# Altium PCB VIrtex_XC7vx690t_2ffg1927i_T_B.PcbDoc (part 5 of 5)
Units mm, origin at the board's own origin, x right, y up, seen from the top; angles counter-clockwise.
Board outline 230 x 148 mm, 12 copper layers (Top Layer 1, GND_IN_Layer, 1_V_IN_layer, 1.2_V_IN_layer, 1.8_V_IN_layer, 3.3_V_IN_layer, IN_Layer 6, IN_Layer 7, IN_Layer 8, IN_Layer 9, IN_Layer 10, Bottom Layer), stack 1.452 mm thick; 73 components, 655 nets, 2765 pads, 42 vias.
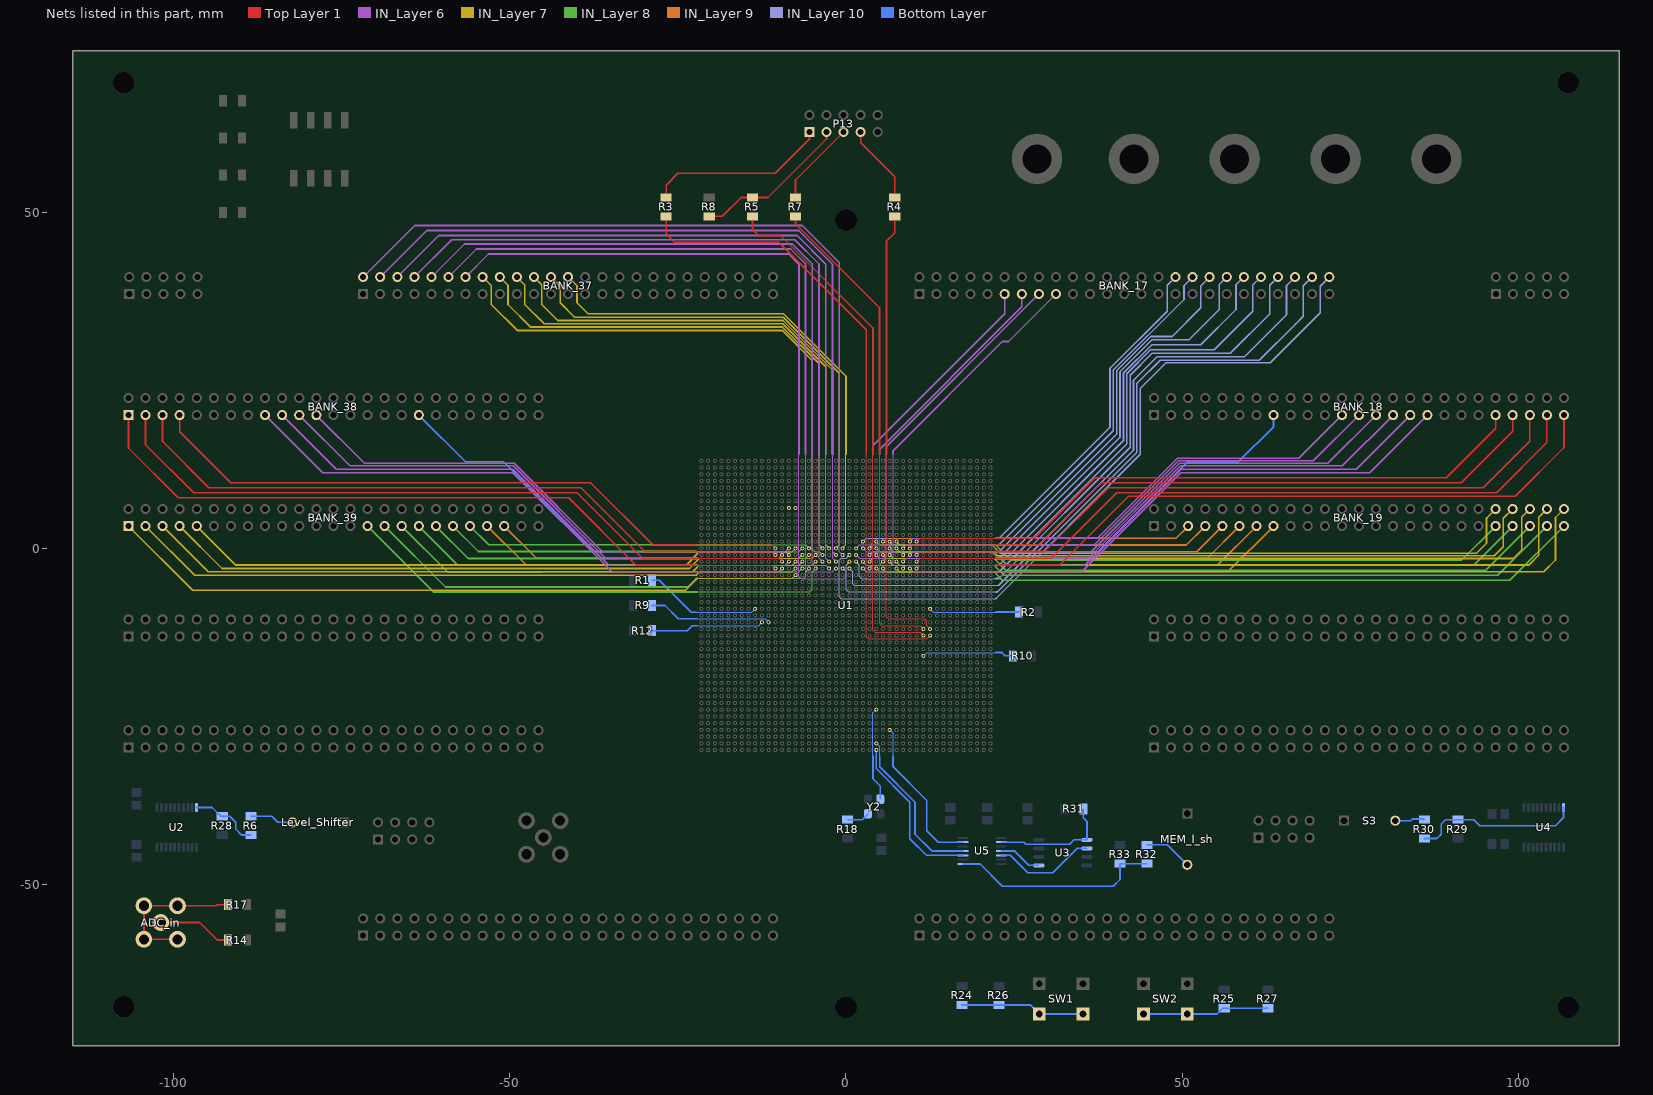
[diagram p15: the nets of this part, all layers, seen from the top]

## Via types
v1: diameter 0.8, hole 0.4, Top Layer 1 to Bottom Layer, 42 vias

## Nets (pads, with @x,y where several pads share a name; then routed paths per layer and width w, separated by ;. In a path a pad name is that pad's centre, name@x,y a point inside that pad or via, vN(x,y) a via of type N, cw(c..) or ccw(c..) an arc to the next point about the centre after c; other vN are vias at no path point) (continued)
N25: BANK_17.32 U1.N25 | length 70.2
  IN_Layer 10 w0.14: U1.N25@2.5,1 3,1.5 22.75,1.5
  IN_Layer 10 w0.254: 22.75,1.5 39.25,18 39.25,26.75 47.75,35.25 47.75,39.09 BANK_17.32@49,40.34
N27: BANK_19.7 U1.N27 | length 50.3
  IN_Layer 9 w0.14: U1.N27@4.5,1 5.01,0.49 22.3,0.49
  IN_Layer 9 w0.254: 22.3,0.49 50.61,0.49 BANK_19.7@53.42,3.3
N28: BANK_19.5 U1.N28 | length 46.3
  IN_Layer 9 w0.14: U1.N28@5.5,1 5.583,1 6.083,1.5 22.3,1.5
  IN_Layer 9 w0.254: 22.3,1.5 49.08,1.5 BANK_19.5@50.88,3.3
N29: BANK_19.41 U1.N29 | length 93.3
  IN_Layer 8 w0.14: U1.N29@6.5,1 6.99,0.51 22.24,0.51 22.3,0.45
  IN_Layer 8 w0.254: 22.3,0.45 24.5,-1.75 91.55,-1.75 BANK_19.41@96.6,3.3
N30: BANK_19.42 U1.N30 | length 94.7
  IN_Layer 7 w0.14: U1.N30@7.5,1 8.01,0.49 21.703,0.49 22.3,-0.107
  IN_Layer 7 w0.254: 22.3,-0.107 22.945,-0.752 93.748,-0.752 95.25,0.75 95.25,4.49 BANK_19.42@96.6,5.84
N32: BANK_18.23 U1.N32 | length 72
  IN_Layer 6 w0.14: U1.N32@9.5,1 9.99,1.49 22.3,1.49
  IN_Layer 6 w0.254: 22.3,1.49 37.395,1.49 49.283,13.378 67.318,13.378 BANK_18.23@73.74,19.8
N33: BANK_18.41 U1.N33 | length 95
  Top Layer 1 w0.14: U1.N33@10.5,1 11.01,1.51 22.3,1.51
  Top Layer 1 w0.254: 22.3,1.51 28.01,1.51 37,10.5 89.25,10.5 96.6,17.85 BANK_18.41@96.6,19.8
NetP13_1: P13.1 R3.2 | length 27.1
  Top Layer 1 w0.254: R3.2@-26.75,52.15 -26.75,54 -25,55.75 -10.5,55.75 -5.442,60.808 P13.1@-5.442,61.892
NetP13_3: P13.3 R5.2 R8.2 | length 23.2
  Top Layer 1 w0.254: R8.2@-20.333,49.35 -18.4,49.35 -15.6,52.15 R5.2@-13.917,52.15 -11.6,52.15 -2.902,60.848 P13.3@-2.902,61.892
NetP13_5: P13.5 R7.2 | length 12.7
  Top Layer 1 w0.254: R7.2@-7.5,52.15 -7.5,54.753 P13.5@-0.362,61.892
NetP13_7: P13.7 R4.1 | length 11.8
  Top Layer 1 w0.254: P13.7@2.178,61.892 2.178,60.322 7.25,55.25 R4.1@7.25,52.15
NetP14_1: ADC_in.1 R14.2 | length 11.3
  Top Layer 1 w0.254: ADC_in.1@-101.9,-55.65 -96.1,-55.65 -93.5,-58.25 R14.2@-91.9,-58.25 ; R14.2@-91.9,-58.975 R14.2@-91.9,-58.75
NetP14_2: ADC_in.2 R17.2 | length 22.6
  Top Layer 1 w0.254: ADC_in.2@-99.4,-58.15 ADC_in.2@-104.4,-58.15 ADC_in.2@-104.4,-53.15 ADC_in.2@-99.4,-53.15 -93.65,-53.15 -93.5,-53 R17.2@-91.9,-53
NetR1_1: R1.1 U1.AC9 | length 17.5
  Bottom Layer w0.14: -22.1,-9.5 -14,-9.5 U1.AC9@-13.5,-9
  Bottom Layer w0.254: R1.1@-28.85,-4.75 -27.75,-4.75 -23,-9.5 -22.1,-9.5
NetR2_1: R2.1 U1.AC35 | length 13.4
  Bottom Layer w0.14: U1.AC35@12.5,-9 12.99,-9.49 22.3,-9.49
  Bottom Layer w0.254: 22.3,-9.49 R2.1@25.74,-9.49
NetR6_1: R6.1 R28.2 U2.OE | length 10.4
  Bottom Layer w0.254: U2.OE@-96.575,-38.55 -94.275,-38.55 -92.975,-39.85 -91.65,-39.85 -90.75,-40.75 -90.75,-41.75 -89.85,-42.65 R6.1@-88.5,-42.65
NetR6_2: Level_Shifter.2 R6.2 | length 6.6
  Bottom Layer w0.254: R6.2@-88.5,-39.85 -85.4,-39.85 -84.5,-40.75 Level_Shifter.2@-82.31,-40.75
NetR9_1: R9.1 U1.AE11 | length 18.4
  Bottom Layer w0.14: -22.1,-10.49 -12.01,-10.49 U1.AE11@-11.5,-11
  Bottom Layer w0.254: R9.1@-28.85,-8.5 -26.916,-8.5 -24.926,-10.49 -22.1,-10.49
NetR10_1: R10.1 U1.AK34 | length 13.8
  Bottom Layer w0.14: U1.AK34@11.5,-16 11.99,-15.51 22.3,-15.51
  Bottom Layer w0.254: 22.3,-15.51 23.201,-15.51 23.691,-16 R10.1@24.85,-16
NetR12_1: R12.1 U1.AE10 | length 16.9
  Bottom Layer w0.14: -22.1,-11.5 -13,-11.5 U1.AE10@-12.5,-11
  Bottom Layer w0.254: R12.1@-28.85,-12.25 -23.6,-12.25 -22.85,-11.5 -22.1,-11.5
NetR18_2: R18.2 Y2.1 | length 3.4
  Bottom Layer w0.254: R18.2@0.25,-40.35 2.437,-40.35 3.25,-39.537 Y2.1@3.25,-39.5
NetR24_1: R24.1 R26.1 SW1.1 SW1.2 | length 18.6
  Bottom Layer w0.254: R24.1@17.25,-67.9 R26.1@22.75,-67.9 27.4,-67.9 SW1.2@28.75,-69.25 SW1.1@35.25,-69.25
NetR25_1: R25.1 R27.1 SW2.1 SW2.2 | length 18.9
  Bottom Layer w0.254: SW2.2@44.25,-69.25 SW2.1@50.75,-69.25 55.175,-69.25 56.025,-68.4 R25.1@56.25,-68.4 R27.1@62.75,-68.4
NetR29_2: R29.2 R30.1 U4.OE | length 25.1
  Bottom Layer w0.254: R30.1@86,-43.15 87.85,-43.15 88.5,-42.5 88.5,-41 89.15,-40.35 R29.2@91,-40.35 93.35,-40.35 94.25,-41.25 105.5,-41.25 106.675,-40.075 U4.OE@106.675,-38.55
NetR30_2: R30.2 S3.2 | length 4.5
  Bottom Layer w0.254: S3.2@81.68,-40.5 84,-40.5 84.25,-40.25 85.9,-40.25 R30.2@86,-40.35
NetR31_1: R31.1 U3.1 U5.A1 | length 17.9
  Bottom Layer w0.254: U5.A1@23.1,-43.7 26.45,-43.7 26.75,-44 33.25,-44 33.905,-43.345 U3.1@35.825,-43.345 35.825,-40.575 35.3,-40.05 R31.1@35.3,-38.75
NetR32_1: R32.1 R33.2 U5.OE | length 31.5
  Bottom Layer w0.254: U5.OE@17.4,-46.95 19.95,-46.95 23.25,-50.25 39.75,-50.25 40.75,-49.25 R33.2@40.75,-46.9 R32.1@44.75,-46.9
NetR32_2: MEM_l_sh.2 R32.2 | length 7.2
  Bottom Layer w0.254: R32.2@44.75,-44.1 47.79,-44.1 MEM_l_sh.2@50.75,-47.06
NetU1_AV27: U1.AV27 Y2.3 | length 14
  Bottom Layer w0.14: 4.01,-30.9 4.01,-24.49 U1.AV27@4.5,-24
  Bottom Layer w0.254: 4.01,-30.9 4.01,-34.26 5.098,-35.348 Y2.3@5.098,-37.3
NetU1_BA29: U1.BA29 U5.B1 | length 23.4
  Bottom Layer w0.14: U1.BA29@6.5,-27 7,-27.5 7,-30.75 7,-30.9
  Bottom Layer w0.254: 7,-30.9 7,-32.5 12,-37.5 12,-42 13.7,-43.7 U5.B1@17.4,-43.7
NetU1_BC27: U1.BC27 U5.B3 | length 24.1
  Bottom Layer w0.14: U1.BC27@4.5,-29 5,-29.5 5,-30.9
  Bottom Layer w0.254: 5,-30.9 5,-32.5 10.25,-37.75 10.25,-42.5 12.75,-45 U5.B3@17.4,-45
NetU1_BD27: U1.BD27 U5.B4 | length 24.2
  Bottom Layer w0.254: U1.BD27@4.5,-30 4.5,-30.9 4.5,-32.75 9.5,-37.75 9.5,-43.178 11.972,-45.65 U5.B4@17.4,-45.65
NetU1_H14: U1.H14
NetU1_H15: U1.H15
NetU3_2: U3.2 U5.A4 | length 15.3
  Bottom Layer w0.254: U5.A4@23.1,-45.65 24.4,-45.65 27,-48.25 30.75,-48.25 34.385,-44.615 U3.2@35.825,-44.615
NetU3_5: U3.5 U5.A3 | length 6.5
  Bottom Layer w0.254: U5.A3@23.1,-45 25,-45 27.155,-47.155 U3.5@28.675,-47.155
P12: BANK_38.7 U1.P12 | length 98.2
  Top Layer 1 w0.14: -22.3,0.51 -11.01,0.51 U1.P12@-10.5,0
  Top Layer 1 w0.254: BANK_38.7@-99.08,19.8 -99.08,17.33 -91.5,9.75 -38,9.75 -28.76,0.51 -22.3,0.51
P14: BANK_38.23 U1.P14 | length 78.9
  IN_Layer 6 w0.14: -22.05,-0.51 -9.01,-0.51 U1.P14@-8.5,0
  IN_Layer 6 w0.254: BANK_38.23@-78.76,19.8 -71.59,12.63 -49.343,12.63 -36.203,-0.51 -22.05,-0.51
P15: BANK_39.9 U1.P15 | length 92.5
  IN_Layer 7 w0.14: -22.1,-0.826 -21.784,-0.51 -8.01,-0.51 U1.P15@-7.5,0
  IN_Layer 7 w0.254: BANK_39.9@-96.54,3.3 -90.74,-2.5 -23.774,-2.5 -22.1,-0.826
P16: BANK_39.39 U1.P16 | length 53.7
  IN_Layer 8 w0.14: -22.1,-0.49 -6.99,-0.49 U1.P16@-6.5,0
  IN_Layer 8 w0.254: BANK_39.39@-58.44,3.3 -54.65,-0.49 -22.1,-0.49
P17: BANK_39.41 U1.P17 | length 51.8
  IN_Layer 8 w0.14: -22.1,0.51 -6.01,0.51 U1.P17@-5.5,0
  IN_Layer 8 w0.254: BANK_39.41@-55.9,3.3 -53.11,0.51 -22.1,0.51
P19: BANK_37.18 U1.P19 | length 82.2
  IN_Layer 7 w0.14: -4,14 -4,0.5 U1.P19@-3.5,0
  IN_Layer 7 w0.254: BANK_37.18@-51.48,40.34 -50.25,39.11 -50.25,36.25 -46.889,32.889 -9.437,32.889 -4,27.452 -4,14
P20: BANK_37.20 U1.P20 | length 80.4
  IN_Layer 7 w0.14: -3,14 -3,0.5 U1.P20@-2.5,0
  IN_Layer 7 w0.254: BANK_37.20@-48.94,40.34 -47.75,39.15 -47.75,36.25 -44.881,33.381 -9.4,33.381 -3,26.981 -3,14
P21: BANK_37.24 U1.P21 | length 76.5
  IN_Layer 7 w0.14: U1.P21@-1.5,0 -1,0.5 -1,14
  IN_Layer 7 w0.254: BANK_37.24@-43.86,40.34 -42.5,38.98 -42.5,36.5 -40.365,34.365 -9.326,34.365 -1,26.039 -1,14
P22: BANK_37.26 U1.P22 | length 74.7
  IN_Layer 7 w0.14: U1.P22@-0.5,0 0,0.5 0,14
  IN_Layer 7 w0.254: BANK_37.26@-41.32,40.34 -40,39.02 -40,36.5 -38.357,34.857 -9.289,34.857 0,25.568 0,14
P24: BANK_17.11 U1.P24 | length 47.9
  IN_Layer 6 w0.14: U1.P24@1.5,0 1.99,0.49 3.683,0.49 4,0.807 4,14
  IN_Layer 6 w0.254: 4,14 4,15.25 23.6,34.85 BANK_17.11@23.6,37.8
P25: BANK_17.13 U1.P25 | length 49.6
  IN_Layer 6 w0.14: U1.P25@2.5,0 2.99,-0.49 4.703,-0.49 5,-0.193 5,14
  IN_Layer 6 w0.254: 5,14 5,14.75 26.14,35.89 BANK_17.13@26.14,37.8
P26: BANK_17.34 U1.P26 | length 71.2
  IN_Layer 10 w0.14: U1.P26@3.5,0 4,0.5 22.75,0.5
  IN_Layer 10 w0.254: 22.75,0.5 39.75,17.5 39.75,26.5 50.25,37 50.25,39.05 BANK_17.34@51.54,40.34
P27: BANK_19.9 U1.P27 | length 53.2
  IN_Layer 9 w0.14: U1.P27@4.5,0 5.01,-0.51 22.3,-0.51
  IN_Layer 9 w0.254: 22.3,-0.51 52.15,-0.51 BANK_19.9@55.96,3.3
P29: BANK_19.43 U1.P29 | length 96.1
  IN_Layer 8 w0.14: U1.P29@6.5,0 6.99,-0.49 21.99,-0.49 22.3,-0.8
  IN_Layer 8 w0.254: 22.3,-0.8 24,-2.5 93.34,-2.5 BANK_19.43@99.14,3.3
P30: BANK_19.44 U1.P30 | length 97.5
  IN_Layer 7 w0.14: U1.P30@7.5,0 8.01,-0.51 21.703,-0.51 22.3,-1.107
  IN_Layer 7 w0.254: 22.3,-1.107 22.319,-1.126 96.374,-1.126 97.75,0.25 97.75,4.45 BANK_19.44@99.14,5.84
P31: BANK_18.25 U1.P31 | length 76
  IN_Layer 6 w0.14: U1.P31@8.5,0 8.99,0.49 22.3,0.49
  IN_Layer 6 w0.254: 22.3,0.49 36.924,0.49 49.438,13.004 69.484,13.004 BANK_18.25@76.28,19.8
P32: BANK_18.43 U1.P32 | length 99.3
  Top Layer 1 w0.14: U1.P32@9.5,0 10.01,0.51 22.3,0.51
  Top Layer 1 w0.254: 22.3,0.51 28.76,0.51 38,9.75 91.5,9.75 99.14,17.39 BANK_18.43@99.14,19.8
R12: BANK_38.5 U1.R12 | length 102
  Top Layer 1 w0.14: -22.3,-0.49 -11.01,-0.49 U1.R12@-10.5,-1
  Top Layer 1 w0.254: BANK_38.5@-101.62,19.8 -101.62,15.87 -94.75,9 -39.415,9 -29.925,-0.49 -22.3,-0.49
R13: BANK_38.21 U1.R13 | length 80.8
  IN_Layer 6 w0.14: -22.1,-1.51 -10.01,-1.51 U1.R13@-9.5,-1
  IN_Layer 6 w0.254: BANK_38.21@-81.3,19.8 -73.75,12.25 -49.492,12.25 -35.732,-1.51 -22.1,-1.51
R14: BANK_38.35 U1.R14 | length 63.6
  Bottom Layer w0.14: -22.1,-0.5 -9,-0.5 U1.R14@-8.5,-1
  Bottom Layer w0.254: BANK_38.35@-63.52,19.8 -56.581,12.861 -50.93,12.861 -37.569,-0.5 -22.1,-0.5
R16: BANK_39.7 U1.R16 | length 96
  IN_Layer 7 w0.14: -22.1,-1.826 -21.784,-1.51 -7.01,-1.51 U1.R16@-6.5,-1
  IN_Layer 7 w0.254: BANK_39.7@-99.08,3.3 -92.78,-3 -23.274,-3 -22.1,-1.826
R17: BANK_39.37 U1.R17 | length 57.7
  IN_Layer 8 w0.14: -22.1,-1.51 -6.01,-1.51 U1.R17@-5.5,-1
  IN_Layer 8 w0.254: BANK_39.37@-60.98,3.3 -56.17,-1.51 -22.1,-1.51
R18: BANK_39.45 U1.R18 | length 48.5
  IN_Layer 9 w0.14: -22.1,-1.5 -5,-1.5 U1.R18@-4.5,-1
  IN_Layer 9 w0.254: BANK_39.45@-50.82,3.3 -46.02,-1.5 -22.1,-1.5
R19: BANK_37.16 U1.R19 | length 85.8
  IN_Layer 7 w0.14: -5,14 -5,-0.193 -4.683,-0.51 -3.99,-0.51 U1.R19@-3.5,-1
  IN_Layer 7 w0.254: BANK_37.16@-54.02,40.34 -52.75,39.07 -52.75,36.25 -48.897,32.397 -9.473,32.397 -5,27.923 -5,14
R21: BANK_37.22 U1.R21 | length 79.6
  IN_Layer 7 w0.14: -2,14 -2,-0.5 U1.R21@-1.5,-1
  IN_Layer 7 w0.254: BANK_37.22@-46.4,40.34 -45.25,39.19 -45.25,36.25 -42.873,33.873 -9.363,33.873 -2,26.51 -2,14
R22: BANK_37.2 U1.R22 | length 120
  IN_Layer 6 w0.14: -1,14 -1,-0.5 U1.R22@-0.5,-1
  IN_Layer 6 w0.254: BANK_37.2@-71.8,40.34 -64.14,48 -6.5,48 -1,42.5 -1,14
R23: BANK_17.50 U1.R23 | length 108.1
  IN_Layer 10 w0.14: U1.R23@0.5,-1 0.01,-1.49 -0.683,-1.49 -0.99,-1.797 -0.99,-7.203 -0.693,-7.5 22.279,-7.5 22.3,-7.479
  IN_Layer 10 w0.254: 22.3,-7.479 43.75,13.971 43.75,23.75 47.589,27.589 63.089,27.589 70.5,35 70.5,38.98 BANK_17.50@71.86,40.34
R24: BANK_17.15 U1.R24 | length 53.3
  IN_Layer 6 w0.14: U1.R24@1.5,-1 2,-1.5 5.75,-1.5 6,-1.25 6,14
  IN_Layer 6 w0.254: 6,14 6,15.12 BANK_17.15@28.68,37.8
R26: BANK_17.36 U1.R26 | length 75.1
  IN_Layer 10 w0.14: U1.R26@3.5,-1 4,-0.5 22.75,-0.5
  IN_Layer 10 w0.254: 22.75,-0.5 40.25,17 40.25,26.442 45.308,31.5 48.5,31.5 52.75,35.75 52.75,39.01 BANK_17.36@54.08,40.34
R27: BANK_19.13 U1.R27 | length 60
  IN_Layer 9 w0.14: U1.R27@4.5,-1 4.99,-1.49 4.99,-2.24 5.26,-2.51 22.3,-2.51
  IN_Layer 9 w0.254: 22.3,-2.51 55.23,-2.51 BANK_19.13@61.04,3.3
R28: BANK_19.11 U1.R28 | length 55.2
  IN_Layer 9 w0.14: U1.R28@5.5,-1 6.01,-1.51 22.3,-1.51
  IN_Layer 9 w0.254: 22.3,-1.51 53.69,-1.51 BANK_19.11@58.5,3.3
R29: BANK_19.46 U1.R29 | length 101.3
  IN_Layer 7 w0.14: U1.R29@6.5,-1 7.01,-1.51 22.3,-1.51
  IN_Layer 7 w0.254: 22.3,-1.51 99.24,-1.51 100.5,-0.25 100.5,4.66 BANK_19.46@101.68,5.84
R31: BANK_18.15 U1.R31 | length 64.7
  Bottom Layer w0.14: U1.R31@8.5,-1 8.99,-0.51 22.3,-0.51
  Bottom Layer w0.254: 22.3,-0.51 37.49,-0.51 50.839,12.839 58.339,12.839 63.58,18.08 BANK_18.15@63.58,19.8
R32: BANK_18.27 U1.R32 | length 77.9
  IN_Layer 6 w0.14: U1.R32@9.5,-1 9.99,-0.51 22.3,-0.51
  IN_Layer 6 w0.254: 22.3,-0.51 36.453,-0.51 49.593,12.63 71.65,12.63 BANK_18.27@78.82,19.8
R33: BANK_18.45 U1.R33 | length 102.1
  Top Layer 1 w0.14: U1.R33@10.5,-1 11.01,-0.49 22.3,-0.49
  Top Layer 1 w0.254: 22.3,-0.49 29.51,-0.49 39,9 94.75,9 101.68,15.93 BANK_18.45@101.68,19.8
T13: BANK_38.3 U1.T13 | length 106.3
  Top Layer 1 w0.14: -22.1,-1.5 -10,-1.5 U1.T13@-9.5,-2
  Top Layer 1 w0.254: BANK_38.3@-104.16,19.8 -104.16,15.41 -97,8.25 -40,8.25 -30.25,-1.5 -22.1,-1.5
T14: BANK_38.19 U1.T14 | length 84.8
  IN_Layer 6 w0.14: -22.1,-2.51 -9.01,-2.51 U1.T14@-8.5,-2
  IN_Layer 6 w0.254: BANK_38.19@-83.84,19.8 -75.79,11.75 -49.521,11.75 -35.261,-2.51 -22.1,-2.51
T15: BANK_39.5 U1.T15 | length 97.6
  IN_Layer 7 w0.14: -22.1,-2.826 -21.784,-2.51 -8.01,-2.51 U1.T15@-7.5,-2
  IN_Layer 7 w0.254: BANK_39.5@-101.62,3.3 -94.82,-3.5 -22.774,-3.5 -22.1,-2.826
T16: BANK_39.35 U1.T16 | length 59.6
  IN_Layer 8 w0.14: -22.1,-2.51 -7.01,-2.51 U1.T16@-6.5,-2
  IN_Layer 8 w0.254: BANK_39.35@-63.52,3.3 -57.71,-2.51 -22.1,-2.51
T18: BANK_39.43 U1.T18 | length 51.5
  IN_Layer 9 w0.14: -22.1,-2.49 -4.99,-2.49 U1.T18@-4.5,-2
  IN_Layer 9 w0.254: BANK_39.43@-53.36,3.3 -47.57,-2.49 -22.1,-2.49
T19: BANK_37.8 U1.T19 | length 108.4
  IN_Layer 6 w0.14: -4.01,14 -4.01,-1.203 -4.018,-1.211 -4.018,-1.421 -3.5,-1.939 U1.T19@-3.5,-2
  IN_Layer 6 w0.254: BANK_37.8@-64.18,40.34 -58.647,45.873 -7.623,45.873 -4.01,42.26 -4.01,14
T20: BANK_37.6 U1.T20 | length 112.5
  IN_Layer 6 w0.14: -3,14 -3,-1.5 U1.T20@-2.5,-2
  IN_Layer 6 w0.254: BANK_37.6@-66.72,40.34 -60.56,46.5 -7.25,46.5 -3,42.25 -3,14
T21: BANK_37.4 U1.T21 | length 116.7
  IN_Layer 6 w0.14: -2,14 -2,-1.5 U1.T21@-1.5,-2
  IN_Layer 6 w0.254: BANK_37.4@-69.26,40.34 -62.35,47.25 -7,47.25 -2,42.25 -2,14
T23: BANK_17.48 U1.T23 | length 101.9
  IN_Layer 10 w0.14: U1.T23@0.5,-2 0.01,-2.49 0.01,-6.203 0.307,-6.5 22.3,-6.5
  IN_Layer 10 w0.254: 22.3,-6.5 22.5,-6.5 43.25,14.25 43.25,24.5 46.713,27.963 61.463,27.963 66.853,33.353 68,34.5 68,39.02 BANK_17.48@69.32,40.34
T24: BANK_17.44 U1.T24 | length 92.1
  IN_Layer 10 w0.14: U1.T24@1.5,-2 1.99,-2.49 1.99,-4.183 2.307,-4.5 22.3,-4.5
  IN_Layer 10 w0.254: 22.3,-4.5 22.75,-4.5 42.25,15 42.25,25.75 45.5,29 57.16,29 63,34.84 63,39.1 BANK_17.44@64.24,40.34
T25: BANK_17.17 U1.T25 | length 55.4
  IN_Layer 6 w0.14: U1.T25@2.5,-2 2.99,-2.49 6.703,-2.49 7,-2.193 7,14
  IN_Layer 6 w0.254: 7,14 7,14.5 23.25,30.75 24.17,30.75 BANK_17.17@31.22,37.8
T26: BANK_17.38 U1.T26 | length 78.5
  IN_Layer 10 w0.14: U1.T26@3.5,-2 4,-1.5 22.75,-1.5
  IN_Layer 10 w0.254: 22.75,-1.5 40.75,16.5 40.75,26.25 45.5,31 51,31 55.5,35.5 55.5,39.22 BANK_17.38@56.62,40.34
T28: BANK_19.45 U1.T28 | length 99.8
  IN_Layer 8 w0.14: U1.T28@5.5,-2 6,-1.5 22,-1.5 22.3,-1.8
  IN_Layer 8 w0.254: 22.3,-1.8 23.75,-3.25 95.13,-3.25 BANK_19.45@101.68,3.3
T29: BANK_19.47 U1.T29 | length 101.6
  IN_Layer 8 w0.14: U1.T29@6.5,-2 7.01,-2.51 22.01,-2.51 22.3,-2.8
  IN_Layer 8 w0.254: 22.3,-2.8 23.5,-4 96.92,-4 BANK_19.47@104.22,3.3
T30: BANK_19.48 U1.T30 | length 103.7
  IN_Layer 7 w0.14: U1.T30@7.5,-2 8,-2.5 22.3,-2.5
  IN_Layer 7 w0.254: 22.3,-2.5 101.5,-2.5 103,-1 103,4.62 BANK_19.48@104.22,5.84
T31: BANK_18.29 U1.T31 | length 81.9
  IN_Layer 6 w0.14: U1.T31@8.5,-2 8.99,-1.51 22.3,-1.51
  IN_Layer 6 w0.254: 22.3,-1.51 35.982,-1.51 49.742,12.25 73.81,12.25 BANK_18.29@81.36,19.8
T33: BANK_18.47 U1.T33 | length 105.1
  Top Layer 1 w0.14: U1.T33@10.5,-2 11.01,-1.49 22.3,-1.49
  Top Layer 1 w0.254: 22.3,-1.49 30.51,-1.49 40.25,8.25 96.75,8.25 104.22,15.72 BANK_18.47@104.22,19.8
TCK: R4.2 U1.AF35 | length 67.7
  Top Layer 1 w0.14: 6.01,14 6.01,-10.203 6.304,-10.497 11.69,-10.497 11.99,-10.797 11.99,-11.49 U1.AF35@12.5,-12
  Top Layer 1 w0.254: 6.01,14 6.01,45.63 7.25,46.87 R4.2@7.25,49.35
TDI: R3.1 U1.AG35 | length 93.8
  Top Layer 1 w0.14: 3.01,14 3.01,-13.203 3.297,-13.49 12.01,-13.49 U1.AG35@12.5,-13
  Top Layer 1 w0.254: R3.1@-26.75,49.35 -26.75,46.75 -25.5,45.5 -10,45.5 3.01,32.49 3.01,14
TDO: R5.1 U1.AG34 | length 78.7
  Top Layer 1 w0.14: 4,14 4,-12.193 4.317,-12.51 11.01,-12.51 U1.AG34@11.5,-13
  Top Layer 1 w0.254: R5.1@-13.917,49.35 -13.917,47.417 -13,46.5 -9.75,46.5 4,32.75 4,14
TMS: R7.1 U1.AF34 | length 72.6
  Top Layer 1 w0.14: 4.99,14 4.99,-11.183 5.317,-11.51 11.01,-11.51 U1.AF34@11.5,-12
  Top Layer 1 w0.254: R7.1@-7.5,49.35 -7.5,48.25 4.99,35.76 4.99,14
U12: BANK_38.1 U1.U12 | length 108.5
  Top Layer 1 w0.14: -22.3,-2.49 -11.01,-2.49 U1.U12@-10.5,-3
  Top Layer 1 w0.254: BANK_38.1@-106.7,19.8 -106.7,14.921 -99.279,7.5 -41.25,7.5 -31.26,-2.49 -22.3,-2.49
U13: BANK_38.17 U1.U13 | length 86.7
  IN_Layer 6 w0.14: -22.05,-3.5 -10,-3.5 U1.U13@-9.5,-3
  IN_Layer 6 w0.254: BANK_38.17@-86.38,19.8 -77.83,11.25 -49.55,11.25 -34.8,-3.5 -22.1,-3.5
U15: BANK_39.3 U1.U15 | length 100.1
  IN_Layer 7 w0.14: -22.1,-3.826 -21.784,-3.51 -8.01,-3.51 U1.U15@-7.5,-3
  IN_Layer 7 w0.254: BANK_39.3@-104.16,3.3 -96.86,-4 -22.274,-4 -22.1,-3.826
U16: BANK_39.33 U1.U16 | length 62.6
  IN_Layer 8 w0.14: -22.1,-3.5 -7,-3.5 U1.U16@-6.5,-3
  IN_Layer 8 w0.254: BANK_39.33@-66.06,3.3 -59.228,-3.532 -45.203,-3.532 -34.004,-3.494 cw(c-34,-4.75) -33.999,-3.494 -22.1,-3.5
U17: BANK_39.31 U1.U17 | length 68.4
  IN_Layer 8 w0.14: -22.1,-4.49 -6.297,-4.49 -5.99,-4.183 -5.99,-3.49 U1.U17@-5.5,-3
  IN_Layer 8 w0.254: BANK_39.31@-68.6,3.3 -59.55,-5.75 -23.57,-5.75 -22.31,-4.49 -22.1,-4.49
U18: BANK_39.29 U1.U18 | length 73.7
  IN_Layer 8 w0.14: -22.1,-6.49 -5.297,-6.49 -5.01,-6.203 -5.01,-3.51 U1.U18@-4.5,-3
  IN_Layer 8 w0.254: BANK_39.29@-71.14,3.3 -61.35,-6.49 -22.1,-6.49
U20: BANK_37.10 U1.U20 | length 107.3
  IN_Layer 6 w0.14: -5.01,14 -5.01,-2.351 -4.861,-2.5 -3,-2.5 U1.U20@-2.5,-3
  IN_Layer 6 w0.254: BANK_37.10@-61.64,40.34 -56.73,45.25 -8,45.25 -5.01,42.26 -5.01,14
U21: BANK_37.12 U1.U21 | length 106.1
  IN_Layer 6 w0.14: -6.01,14 -6.01,-3.341 -5.861,-3.49 -1.99,-3.49 U1.U21@-1.5,-3
  IN_Layer 6 w0.254: BANK_37.12@-59.1,40.34 -54.94,44.5 -8.25,44.5 -6.01,42.26 -6.01,14
U22: BANK_37.14 U1.U22 | length 106.7
  IN_Layer 6 w0.14: -7,14 -7,-4 -6.99,-4.01 -6.99,-4.203 -6.703,-4.49 -6.51,-4.49 -6.5,-4.5 -0.307,-4.5 -0.01,-4.203 -0.01,-3.49 U1.U22@-0.5,-3
  IN_Layer 6 w0.254: BANK_37.14@-56.56,40.34 -53.15,43.75 -8.5,43.75 -7,42.25 -7,14
U23: BANK_17.46 U1.U23 | length 96
  IN_Layer 10 w0.14: U1.U23@0.5,-3 0.99,-3.49 0.99,-5.24 1.25,-5.5 22.695,-5.5
  IN_Layer 10 w0.254: 22.695,-5.5 42.75,14.555 42.75,25 46.25,28.5 59.25,28.5 65.5,34.75 65.5,39.06 BANK_17.46@66.78,40.34
U25: BANK_17.42 U1.U25 | length 86
  IN_Layer 10 w0.14: U1.U25@2.5,-3 2.99,-3.49 22.76,-3.49 23,-3.25
  IN_Layer 10 w0.254: 23,-3.25 41.75,15.5 41.75,25.971 45.279,29.5 54.75,29.5 60.5,35.25 60.5,39.14 BANK_17.42@61.7,40.34
U26: BANK_17.40 U1.U26 | length 81.6
  IN_Layer 10 w0.14: U1.U26@3.5,-3 4,-2.5 22.3,-2.5
  IN_Layer 10 w0.254: 22.3,-2.5 22.75,-2.5 41.25,16 41.25,26 45.5,30.25 52.75,30.25 58,35.5 58,39.18 BANK_17.40@59.16,40.34
U27: BANK_19.15 U1.U27 | length 62.1
  IN_Layer 9 w0.14: U1.U27@4.5,-3 5,-3.5 22.3,-3.5
  IN_Layer 9 w0.254: 22.3,-3.5 56.78,-3.5 BANK_19.15@63.58,3.3
U28: BANK_19.49 U1.U28 | length 105.3
  IN_Layer 8 w0.14: U1.U28@5.5,-3 6.01,-3.51 22.01,-3.51 22.3,-3.8
  IN_Layer 8 w0.254: 22.3,-3.8 23.25,-4.75 95.699,-4.75 98.71,-4.75 BANK_19.49@106.76,3.3
U30: BANK_19.50 U1.U30 | length 107
  IN_Layer 7 w0.14: U1.U30@7.5,-3 7.99,-3.49 22.3,-3.49
  IN_Layer 7 w0.254: 22.3,-3.49 103.76,-3.49 105.5,-1.75 105.5,4.58 BANK_19.50@106.76,5.84
U31: BANK_18.31 U1.U31 | length 84.8
  IN_Layer 6 w0.14: U1.U31@8.5,-3 8.99,-2.51 22.3,-2.51
  IN_Layer 6 w0.254: 22.3,-2.51 35.511,-2.51 49.771,11.75 75.85,11.75 BANK_18.31@83.9,19.8
U32: BANK_18.33 U1.U32 | length 86.8
  IN_Layer 6 w0.14: U1.U32@9.5,-3 10,-3.5 22.3,-3.5
  IN_Layer 6 w0.254: 22.3,-3.5 35.05,-3.5 49.8,11.25 77.89,11.25 BANK_18.33@86.44,19.8
U33: BANK_18.49 U1.U33 | length 108.5
  Top Layer 1 w0.14: U1.U33@10.5,-3 11.01,-2.49 22.3,-2.49
  Top Layer 1 w0.254: 22.3,-2.49 31.76,-2.49 42,7.75 99.529,7.75 106.76,14.981 BANK_18.49@106.76,19.8
V15: BANK_39.1 U1.V15 | length 104.1
  IN_Layer 7 w0.14: -22.1,-4.49 -7.99,-4.49 U1.V15@-7.5,-4
  IN_Layer 7 w0.254: BANK_39.1@-106.7,3.3 -97.15,-6.25 -23.86,-6.25 -22.1,-4.49
pads on no net: BANK_14.3 BANK_14.18 BANK_14.20 BANK_14.23 BANK_14.47 BANK_38.49 BANK_38.50 P13.6 P13.8 P13.9 U1.* U1.A5 U1.A6 U1.A9 U1.A10 U1.A35 U1.A36 U1.A39 U1.A40 U1.AA1 U1.AA2 U1.AA5 U1.AA6 U1.AA9 U1.AA10 U1.AA35 U1.AA36 U1.AA39 U1.AA40 U1.AA43 U1.AA44 U1.AB3 U1.AB4 U1.AB7 U1.AB8 U1.AB37 U1.AB38 U1.AB41 U1.AB42 U1.AC1 U1.AC2 U1.AC5 U1.AC6 U1.AC39 U1.AC40 U1.AC43 U1.AC44 U1.AD3 U1.AD4 U1.AD7 U1.AD8 U1.AD37 U1.AD38 U1.AD41 U1.AD42 U1.AE1 U1.AE2 U1.AE5 U1.AE6 U1.AE39 U1.AE40 U1.AE43 U1.AE44 U1.AF3 U1.AF4 U1.AF7 U1.AF8 U1.AF37 U1.AF38 U1.AF41 U1.AF42 U1.AG1 U1.AG2 U1.AG5 U1.AG6 U1.AG39 U1.AG40 U1.AG43 U1.AG44 U1.AH3 U1.AH4 U1.AH7 U1.AH8 U1.AH37 U1.AH38 U1.AH41 U1.AH42 U1.AJ1 U1.AJ2 U1.AJ5 U1.AJ6 U1.AJ9 U1.AJ10 U1.AJ35 U1.AJ36 U1.AJ39 U1.AJ40 U1.AJ43 U1.AJ44 U1.AK3 U1.AK4 U1.AK7 U1.AK8 U1.AK37 U1.AK38 U1.AK41 U1.AK42 U1.AL1 U1.AL2 U1.AL5 U1.AL6 U1.AL9 U1.AL10 U1.AL35 U1.AL36 U1.AL39 U1.AL40 U1.AL43 U1.AL44 U1.AM3 U1.AM4 U1.AM7 U1.AM8 U1.AM37 U1.AM38 U1.AM41 U1.AM42 U1.AN1 U1.AN2 U1.AN5 U1.AN6 U1.AN9 U1.AN10 U1.AN35 U1.AN36 U1.AN39 U1.AN40 U1.AN43 U1.AN44 U1.AP3 U1.AP4 U1.AP7 U1.AP8 U1.AP37 U1.AP38 U1.AP41 U1.AP42 U1.AR1 U1.AR2 U1.AR5 U1.AR6 U1.AR9 U1.AR10 U1.AR35 U1.AR36 U1.AR39 U1.AR40 U1.AR43 U1.AR44 U1.AT3 U1.AT4 U1.AT7 U1.AT8 U1.AT37 U1.AT38 U1.AT41 U1.AT42 U1.AU1 U1.AU2 U1.AU5 U1.AU6 U1.AU39 U1.AU40 U1.AU43 U1.AU44 U1.AV3 U1.AV4 U1.AV7 U1.AV8 U1.AV37 U1.AV38 U1.AV41 U1.AV42 U1.AW1 U1.AW2 U1.AW5 U1.AW6 U1.AW39 U1.AW40 U1.AW43 U1.AW44 U1.AY3 U1.AY4 U1.AY7 U1.AY8 U1.AY37 U1.AY38 U1.AY41 U1.AY42 U1.B3 U1.B4 U1.B7 U1.B8 U1.B37 U1.B38 U1.B41 U1.B42 U1.BA1 U1.BA2 U1.BA5 U1.BA6 U1.BA39 U1.BA40 U1.BA43 U1.BA44 U1.BB3 U1.BB4 U1.BB7 U1.BB8 U1.BB37 U1.BB38 U1.BB41 U1.BB42 U1.BC5 U1.BC6 U1.BC39 U1.BC40 U1.BD3 U1.BD4 U1.BD7 U1.BD8 U1.BD37 U1.BD38 U1.BD41 U1.BD42 U1.C1 U1.C2 U1.C5 U1.C6 U1.C9 U1.C10 U1.C35 U1.C36 U1.C39 U1.C40 U1.C43 U1.C44 U1.D3 U1.D4 U1.D7 U1.D8 U1.D37 U1.D38 U1.D41 U1.D42 U1.E1 U1.E2 U1.E5 U1.E6 U1.E9 U1.E10 U1.E35 U1.E36 U1.E39 U1.E40 U1.E43 U1.E44 U1.F3 U1.F4 U1.F7 U1.F8 U1.F37 U1.F38 U1.F41 U1.F42 U1.G1 U1.G2 U1.G5 U1.G6 U1.G9 U1.G10 U1.G35 U1.G36 U1.G39 U1.G40 U1.G43 U1.G44 U1.H3 U1.H4 U1.H7 U1.H8 U1.H37 U1.H38 U1.H41 U1.H42 U1.J1 U1.J2 U1.J5 U1.J6 U1.J9 U1.J10 U1.J35 U1.J36 U1.J39 U1.J40 U1.J43 U1.J44 U1.K3 U1.K4 U1.K7 U1.K8 U1.K37 U1.K38 U1.K41 U1.K42 U1.L1 U1.L2 U1.L5 U1.L6 U1.L9 U1.L10 U1.L35 U1.L36 U1.L39 U1.L40 U1.L43 U1.L44 U1.M3 U1.M4 U1.M7 U1.M8 U1.M37 U1.M38 U1.M41 U1.M42 U1.N1 U1.N2 U1.N5 U1.N6 U1.N9 U1.N10 U1.N35 U1.N36 U1.N39 U1.N40 U1.N43 U1.N44 U1.P3 U1.P4 U1.P7 U1.P8 U1.P37 U1.P38 U1.P41 U1.P42 U1.R1 U1.R2 U1.R5 U1.R6 U1.R9 U1.R10 U1.R35 U1.R36 U1.R39 U1.R40 U1.R43 U1.R44 U1.T3 U1.T4 U1.T7 U1.T8 U1.T37 U1.T38 U1.T41 U1.T42 U1.U1 U1.U2 U1.U5 U1.U6 U1.U9 U1.U10 U1.U35 U1.U36 U1.U39 U1.U40 U1.U43 U1.U44 U1.V3 U1.V4 U1.V7 U1.V8 U1.V37 U1.V38 U1.V41 U1.V42 U1.W1 U1.W2 U1.W5 U1.W6 U1.W9 U1.W10 U1.W35 U1.W36 U1.W39 U1.W40 U1.W43 U1.W44 U1.Y3 U1.Y4 U1.Y7 U1.Y8 U1.Y37 U1.Y38 U1.Y41 U1.Y42 U3.3 U3.7 U5.N.C

## Polygon pours and split planes (outlines as drawn)
1.8V on 1.8_V_IN_layer "1.8V_Poligon" (solid, pour order 3): -115,74 -115,-74 115,-74 115,74
3.3V on 3.3_V_IN_layer "3.3V_Poligon" (solid, pour order 4): -115,74 -115,-74 115,-74 115,74
1.2V on 1.2_V_IN_layer "1.2V_Poligon" (solid, pour order 2): -115,74 -115,-74 115,-74 115,74
1V on 1_V_IN_layer "1V_Poligon" (solid, pour order 1): -115,74 -115,-74 115,-74 115,74
GND on GND_IN_Layer "GND_Poligon" (solid, pour order 0): 115,74 115,-74 -115,-74 -115,74

## Silkscreen, mask and mechanical layers (free items; w line width, h text height)
Top Overlay:
  lines w0.154: -57.5,52 -40.25,52 ; -57.5,54 -40.25,54 ; -57.5,56 -40.25,56 ; -57.5,58.25 -40.25,58.25 ; -57.5,60.5 -40.25,60.5 ; -57.5,62.75 -40.25,62.75 ; -57.5,65 -40.25,65
  lines w0.254: -107.5,-23.5 -97.5,-23.5 ; -107.5,-7.5 -104.5,-7.5 -100.5,-7.5 -98,-7.5 -97.5,-7.5 ; -107.5,9.75 -97.5,9.75 ; -107.5,25.75 -97.5,25.75 ; -72.75,-51.75 -62.75,-51.75 ; -72.75,44 -62.75,44 ; -57.5,55 -57.5,58.25 ; -57.5,56 -57.5,54 -57.5,52 -57.5,50 -40.25,50 -40.25,52 -40.25,54 -40.25,56 -40.25,58.25 ; -57.5,57.75 -57.5,60.5 ; -57.5,60.25 -57.5,62.75 ; -57.5,62.5 -57.5,65 -57.5,67.5 -40.25,67.5 -40.25,65 -40.25,62.75 -40.25,60.25 ; -47,50 -47,67.5 ; -40.25,57.5 -40.25,60.5 ; 9.75,-51.75 19.75,-51.75 ; 10,44 20,44 ; 45,-23.5 55,-23.5 ; 45,-7.5 55,-7.5 ; 45,9.75 55,9.75 ; 45,25.75 55,25.75
  text "Conf_Mode" at -56.75,65.75 h1.52
  text "M[2:0]" at -45.75,65.75 h1.52
  text "Master Serial" at -56.75,63.25 h1.52
  text "000" at -45,63.25 h1.52
  text "Master SPI" at -56.75,61 h1.52
  text "001" at -45,61 h1.52
  text "Master BPI" at -56.75,58.75 h1.52
  text "010" at -45,58.75 h1.52
  text "Master SelMAP" at -56.75,56.5 h1.52
  text "100" at -45,56.5 h1.52
  text "OFF/ON" at -69.25,56.25 h1.82 r90
  text "JTAG" at -56.75,54.5 h1.52
  text "101" at -45,54.5 h1.52
  text "Slave SelMAP" at -56.75,52.5 h1.52
  text "110" at -45,52.5 h1.52
  text "Slave Serial" at -56.75,50.5 h1.52
  text "111" at -45,50.5 h1.52
  text "M_2" at -79,49.75 h1.52 r90
  text "M_1" at -76.5,49.75 h1.52 r90
  text "M_0" at -74,49.75 h1.52 r90
  text "CFG_BUS" at -81.5,46.75 h1.52 r90
  text "1.8v" at -98.266,42.682 h1.3 r90
  text "1.8v" at -95.766,42.682 h1.3 r90
  text "1.8v" at 104.984,42.682 h1.3 r90
  text "1.8v" at 107.484,42.682 h1.3 r90
  text "3.3v" at -106.103,42.597 h1.3 r90
  text "3.3v" at -103.353,42.597 h1.3 r90
  text "1.8v" at -100.853,42.597 h1.3 r90
  text "3.3v" at 97.147,42.597 h1.3 r90
  text "3.3v" at 99.897,42.597 h1.3 r90
  text "1.8v" at 102.397,42.597 h1.3 r90
  text "R22 T21 T20 T19 U20 U21 U22 R19 P19 P20 R21 P21 P22 H22 G22 G21 F21 E21 D21 E22 D22 B21 B22 C22 J22" at -73,42.249 h1.38
  text "A23 A24 C24 A25 B25 C25 D24 E24 F25 G26 H25 J26 K26 L26 M26 N25 P26 R26 T26 U26 U25 T24 U23 T23 R23" at 9.75,42.25 h1.38
  text "N19 N20 M21 N22 M22 L19 M20 K22 K21 L21 L20 K19 J19 H19 H20 G20 F19 F20 D20 C20 B20 A20 J20 A21 J21" at -73,34.999 h1.38
  text "B23 E23 C23 N23 N24 P24 P25 R24 T25 F23 F24 G23 H24 H23 K23 J24 D25 L23 K24 L24 M23 M25 G25 J25 L25" at 9.75,35 h1.38
  text "GND" at -105.754,32.504 h1.3 r90
  text "GND" at -103.254,32.504 h1.3 r90
  text "GND" at -100.754,32.504 h1.3 r90
  text "GND" at -98.254,32.504 h1.3 r90
  text "GND" at -95.754,32.504 h1.3 r90
  text "GND" at 97.246,32.504 h1.3 r90
  text "GND" at 99.746,32.504 h1.3 r90
  text "GND" at 102.246,32.504 h1.3 r90
  text "GND" at 104.746,32.504 h1.3 r90
  text "GND" at 107.246,32.504 h1.3 r90
  text "A15 A14 A13 B12 C12 D12 E12 F13 G12 H12 J12 B15 C14 B13 C13 D14 E13 F14 G13 H13 J14 C15 D15 E14 N.C" at -108,24.25 h1.38
  text "F31 E31 D31 D30 B31 B30 C30 F30 J31 H32 G32 E32 D32 C32 B32 A31 A30 J32 H33 G33 F33 E33 C33 B33 A33" at 44.75,24.25 h1.38
  text "U12 T13 R12 P12 N12 M12 L13 K12 U13 T14 R13 P14 N13 M13 L14 K13 J15 R14 N14 M15 L15 K14 G15 F15 N.C" at -108,17 h1.38
  text "G31 G30 H30 J30 K31 L30 M31 R31 K32 L31 M32 N32 P31 R32 T31 U31 U32 K33 L33 M33 N33 P32 R33 T33 U33" at 44.674,17 h1.37
  text "A16 B16 C17 D16 E17 F18 G17 H18 J17 K17 L18 M17 N17 C19 A19 A18 B18 B17 C18 D17 D19 E18 E19 G18 K18" at -108,7.75 h1.38
  text "F26 E26 E27 D26 C27 B26 H28 H29 G28 F29 E29 D29 C29 B28 A29 A28 J29 K29 L29 M30 N30 P30 R29 T30 U30" at 45.037,7.75 h1.37
  text "K27 M27 N28 N27 P27 R28 R27 U27 H27 G27 F28 E28 D27 C28 B27 A26 J27 K28 L28 M28 N29 P29 T28 T29 U28" at 44.75,0.5 h1.37
  text "V15 U15 T15 R16 P15 N15 M16 L16 K16 J16 H17 G16 F16 E16 U18 U17 U16 T16 R17 P16 P17 T18 R18 N18 M18" at -108,0.25 h1.38
  text "BD16 BD17 BB16 BA16 AY17 AW16 AV17 AU16 AT16 AR17 AP16 AN17 AM16 AL16 AM17 AM18 AN18 AP17 AR18 AT18 AU18 AU17 AV18 AW17 AY18" at -107.75,-8.75 h1.03
  text "AV28 AT28 AR27 AP27 AN27 AN28 AM27 BC28  N.C N.C AT29 AR28 AP29 AN29 AM28 AL28 AK28 AK27 AR29 AP30 AN30 AM30 AL29 AK29 AJ29" at 45,-8.75 h1.05
  text "BD15 BC15 BB15 BA15 AY16 AW15 AV15 AU15 AT15 AR16 AP15 AN15 AM15 AL15 AK16 AJ16 AK17 AK18 AL18 BC19 BC18 BC17 BB18 BB17 BA18" at -107.75,-15.75 h1.04
  text "AW27  N.C AW29 AY28 BA28 AY27 AU28 AV29 AW30 AY29 BA30  N.C BB28 BC29 BD29 AT30 AU30 AV30 AW31 AY31 BD30 BC30 BB30  N.C BA31" at 44.75,-15.75 h1.04
  text "AK12 AL13 AM12 AN12 AP12 AR12 AJ14 AK13 AL14 AM13 AN13 AP14 AR13 AT13 AU13 AK14 AN14 AR14 AT14 AV13 AV14 AW14 AY13 BA13 BB12" at -107.802,-25 h1.04
  text "AY32 AW32 AV33 AU32 AT31 AR31 AP31 AJ30 AM31 AL31 AK31 AJ31 AU33 AR32 AP32 AN32 AM32 AK32 AJ32 AT33 AR33 AN33 AM33 AL33 AK33" at 44.5,-25.25 h1.04
  text "AY11 BD10 BC10 BB10 BA10 AW11 AW10 AV10 AU10 AU11 BD11 BC12 BB11 BA11 AY12 AW12 AV12 AU12 AY14 BA14 BC14 BD14 BB13 BC13 BD12" at -108,-32.25 h1.03
  text "BB31 BD31 BB33 AY33 BA33 BB32 BC33 BC32 BD32 AU31 AL30 AV32 AV34 AW34 AY34 BA34 BC34 BD34 AU35 AV35 AW35 BA35 BB35 BC35 BD35" at 44.75,-32.25 h1.03
  text "Level_Shifter" at 71.254,-37.546 h1.2
  text "BD35" at 61.75,-38.405 h1.52 r90
  text "BB35" at 64.178,-38.405 h1.52 r90
  text "AW35" at 66.928,-38.405 h1.52 r90
  text "AU35" at 69.233,-38.405 h1.52 r90
  text "AV10" at -69,-38.75 h1.52 r90
  text "AW11" at -66.5,-38.75 h1.52 r90
  text "BB10" at -64.03,-38.75 h1.52 r90
  text "BD10" at -61.5,-38.75 h1.52 r90
  text "Level" at -59.496,-41.496 h1.3
  text "Level" at 53.254,-41.496 h1.3
  text "3.3v" at -59.496,-43.496 h1.3
  text "3.3v" at 54.504,-43.496 h1.3
  text "OFF/ON" at -81.586,-44.783 h1.82
  text "ON/OFF" at 74.664,-44.783 h1.82
  text "AY11" at -61.5,-48.068 h1.52 r90
  text "BA10" at -66.5,-48.152 h1.52 r90
  text "BC35" at 61.75,-48.155 h1.52 r90
  text "BA35" at 64.178,-48.155 h1.52 r90
  text "AV35" at 66.928,-48.155 h1.52 r90
  text "BD34" at 69.233,-48.155 h1.52 r90
  text "BC10" at -64.016,-48.227 h1.52 r90
  text "AW10" at -69.082,-48.63 h1.52 r90
  text "AJ21 AJ22 AK19 AK21 AK22 AP19 AP21 AM21 AM22 AL19 AL20 AN19 AM20 AL21 AN22 AU22 AR19 AT19 AR21 AR22 AP22 AN20 AP20 AT21 AV22" at -72.589,-53 h1.04
  text "BB25 BA25 BA24 AY24 AW25 AW24 BB26 BA26 AY26 AW26 AU27 AU26 AT26 AU25 AT24 AU23 AM23 AN24 AN25 AP26 AK23 AK24 AK26 AJ26 AJ25" at 9.852,-52.993 h1.03
  text "AT20 AU20 AU21 AV19 AW19 AY19 BA19 BB20 BC20 AV20 BC22 BD22 AR23 AY21 BA20 BA21 BD19 BD20 BD21 AW20 AW21 AW22 BB21 BB22 AY22" at -73.25,-60.25 h1.03
  text "BC24 BC25 BC23 AY23 BA23 BB23 BD26 AV25 BD25 AV24 BD24 AV23 AT23 AR24 AT25 AR26 AN23 AP24 AP25 AM25 AM26 AL23 AL24 AL25 AL26" at 9.75,-60.25 h1.04
  text "Virtex_XC7vx690t_2ffg1927i_Test_Board 08.26. NAS" at -99.746,-68.638 h1.82
Bottom Overlay:
  text "OFF/ON" at 52.75,-46.25 h1.82 r270
Top Solder:
  circle w1.6: c-107.4,-68.2 r0.8
  circle w1.6: c0,-68.25 r0.8
  circle w1.6: c107.4,-68.25 r0.8
  circle w1.6: c107.4,69.2 r0.8
  circle w1.6: c0,48.75 r0.8
  circle w1.6: c-107.4,69.2 r0.8
Bottom Solder:
  circle w1.6: c-107.4,-68.2 r0.8
  circle w1.6: c0,-68.25 r0.8
  circle w1.6: c107.4,-68.25 r0.8
  circle w1.6: c107.4,69.2 r0.8
  circle w1.6: c0,48.75 r0.8
  circle w1.6: c-107.4,69.2 r0.8
Mechanical 1:
  circle w0.1: c0,48.75 r3.45
Outline:
  the board outline again, w0.254

## Text inside footprints (layer, text, board x,y; h text height)
BANK_14: Top Overlay "50" at 108.792,-11.068 h1.27; Top Overlay "49" at 108.792,-13.608 h1.27; Top Overlay "1" at 43.26,-13.608 h1.27; Top Overlay "2" at 43,-11.1 h1.27
BANK_15: Top Overlay "2" at 8.1,-55.6 h1.27; Top Overlay "1" at 8.36,-58.108 h1.27; Top Overlay "49" at 73.892,-58.108 h1.27; Top Overlay "50" at 73.892,-55.568 h1.27
BANK_16: Top Overlay "50" at 108.792,-27.568 h1.27; Top Overlay "49" at 108.792,-30.108 h1.27; Top Overlay "1" at 43.26,-30.108 h1.27; Top Overlay "2" at 43,-27.6 h1.27
BANK_17: Top Overlay "2" at 8.1,39.8 h1.27; Top Overlay "1" at 8.36,37.292 h1.27; Top Overlay "49" at 73.892,37.292 h1.27; Top Overlay "50" at 73.892,39.832 h1.27
BANK_18: Top Overlay "2" at 43,21.8 h1.27; Top Overlay "1" at 43.26,19.292 h1.27; Top Overlay "49" at 108.792,19.292 h1.27; Top Overlay "50" at 108.792,21.832 h1.27
BANK_19: Top Overlay "50" at 108.792,5.332 h1.27; Top Overlay "49" at 108.792,2.792 h1.27; Top Overlay "1" at 43.26,2.792 h1.27; Top Overlay "2" at 43,5.3 h1.27
BANK_34: Top Overlay "50" at -43.708,-11.068 h1.27; Top Overlay "49" at -43.708,-13.608 h1.27; Top Overlay "1" at -109.24,-13.608 h1.27; Top Overlay "2" at -109.5,-11.1 h1.27
BANK_35: Top Overlay "50" at -8.808,-55.568 h1.27; Top Overlay "49" at -8.808,-58.108 h1.27; Top Overlay "1" at -74.34,-58.108 h1.27; Top Overlay "2" at -74.6,-55.6 h1.27
BANK_36: Top Overlay "50" at -43.708,-27.568 h1.27; Top Overlay "49" at -43.708,-30.108 h1.27; Top Overlay "1" at -109.24,-30.108 h1.27; Top Overlay "2" at -109.5,-27.6 h1.27
BANK_37: Top Overlay "50" at -8.808,39.832 h1.27; Top Overlay "49" at -8.808,37.292 h1.27; Top Overlay "1" at -74.34,37.292 h1.27; Top Overlay "2" at -74.6,39.8 h1.27
BANK_38: Top Overlay "2" at -109.5,21.8 h1.27; Top Overlay "1" at -109.24,19.292 h1.27; Top Overlay "49" at -43.708,19.292 h1.27; Top Overlay "50" at -43.708,21.832 h1.27
BANK_39: Top Overlay "2" at -109.5,5.3 h1.27; Top Overlay "1" at -109.24,2.792 h1.27; Top Overlay "49" at -43.708,2.792 h1.27; Top Overlay "50" at -43.708,5.332 h1.27
P13: Top Overlay "N.C" at 5.084,55.082 h1 r90; Top Overlay "TCK" at 2.684,54.916 h1 r90; Top Overlay "TMS" at 0.322,54.916 h1 r90; Top Overlay "TDO" at -2.216,54.916 h1 r90; Top Overlay "TDI" at -4.916,55.249 h1 r90; Top Overlay "N.C" at 0.284,68.716 h1 r90; Top Overlay "GND" at -4.916,68.716 h1 r90; Top Overlay "JTAG" at -11.207,62.628 h1.1 r90; Top Overlay "GND" at 5.084,68.716 h1 r90; Top Overlay "N.C" at 2.684,68.716 h1 r90; Top Overlay "V_ref" at -2.382,68.716 h1 r90
U1: Top Overlay "NP483_1936" at -36.25,29.5 h1.52